# EAGLE board Casillero (EAGLE 9.6.2)
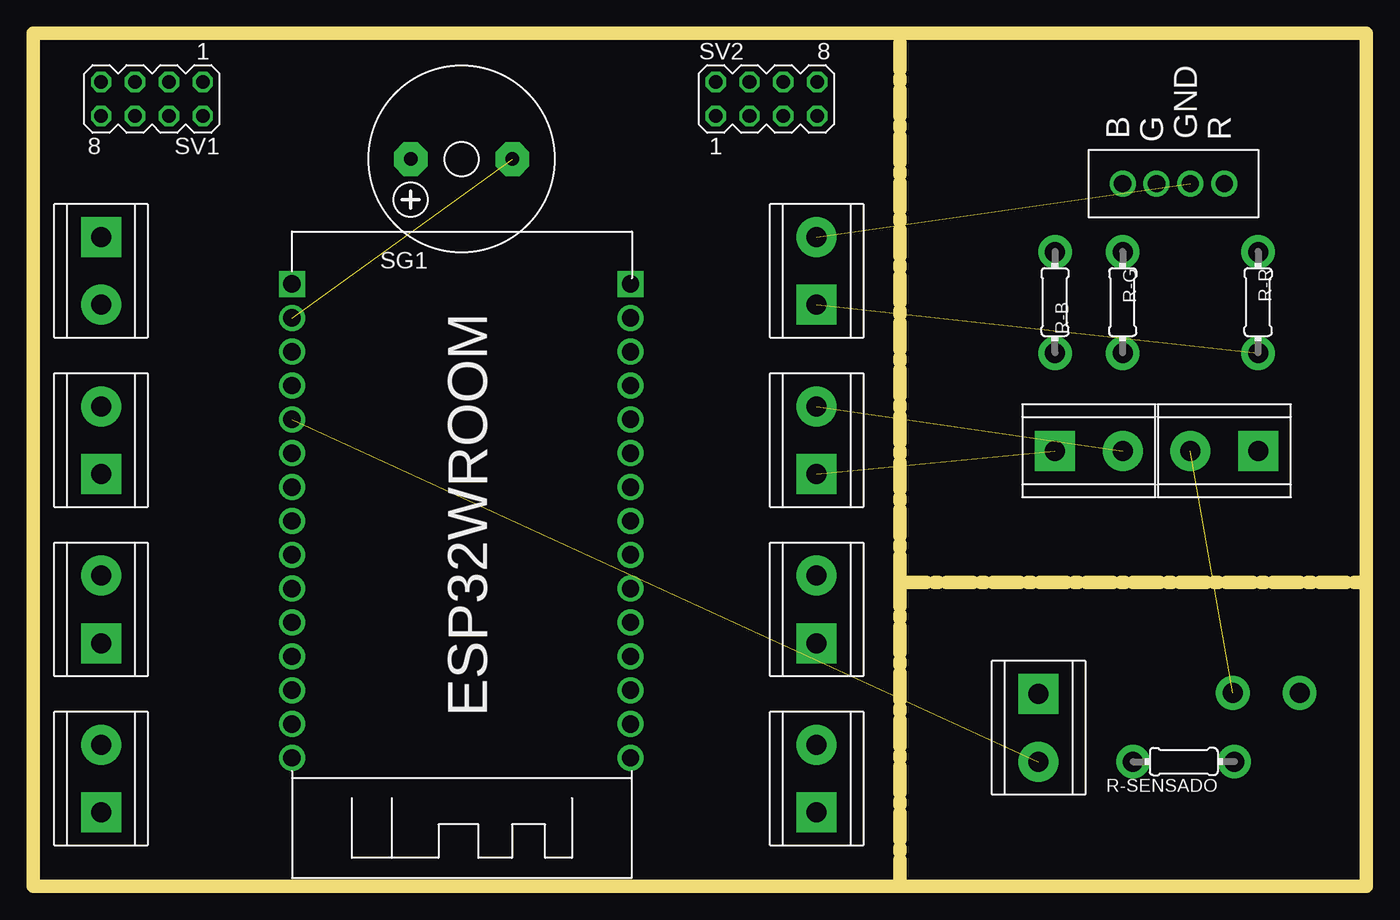
[diagram p0: board, top side]
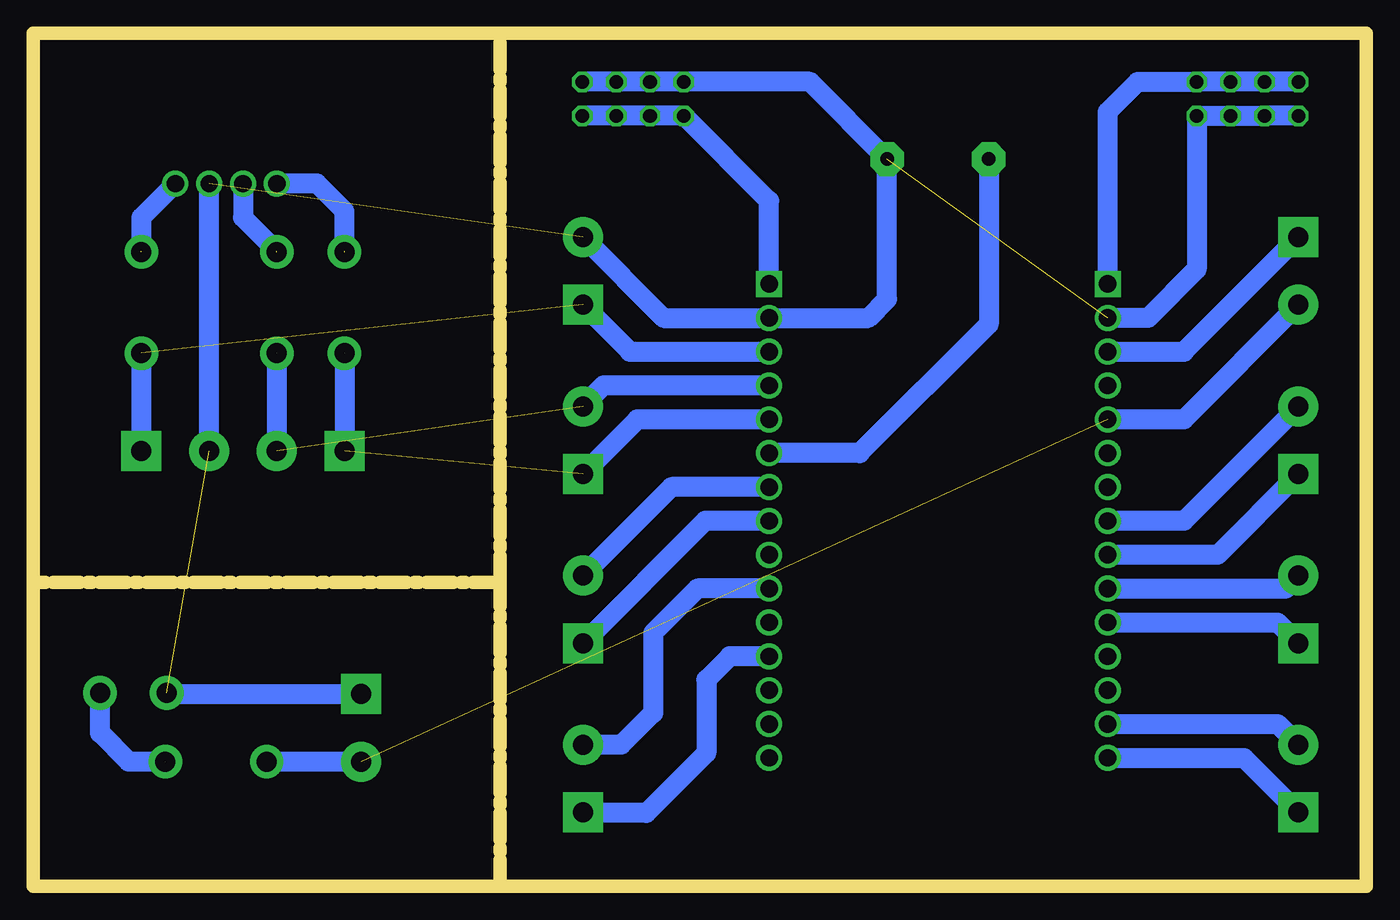
[diagram p1: board, bottom side, seen from below]

Size 100 x 64 mm. Coordinates in mm from the lower left corner, seen from the top.
Outline: 65,0 0,0 0,64 65,64
Outline: 65,0 100,0 100,22.78
Outline: 100,22.78 100,64 65,64
Outline: 65,0 65,22.78
Outline: 65,22.78 65,64
Outline: 65,22.78 100,22.78
Copper layers (1*16): Top 0.035mm / dielectric 1.5mm / Bottom 0.035mm
Design rules "default": minimum track width 6mil, minimum drill 0.35mm, track to track 6mil, track to pad 6mil, pad to pad 6mil, via to via 6mil, smd to smd 6mil, copper to edge 40mil, drill to drill 6mil, minimum pad ring 10mil, minimum via ring 8mil, stop-mask expansion 4mil, vias tented up to drill 0mil, thermal gap 10mil

## Footprints (pad centres in the part's own frame; a part is rotated, then mirrored left to right if it is on the bottom)
0204/7 = drill 0.813 octagon: 1 -3.81,0; 2 3.81,0
F/CM12P = drill 1.016 pad 2.54 octagon: + 3.81,0; - -3.81,0
MA04-2 = drill 1.016 octagon: 1 -3.81,-1.27; 2 -3.81,1.27; 3 -1.27,-1.27; 4 -1.27,1.27; 5 1.27,-1.27; 6 1.27,1.27; 7 3.81,-1.27; 8 3.81,1.27
ESP32WROOM = drill 1.3 square: 3V3 18.56,14; VIN 18.56,-11.4 | drill 1.3: D2 10.94,14; D4 8.4,14; D5 0.78,14; D12 10.94,-11.4; D13 13.48,-11.4; D14 8.4,-11.4; D15 13.48,14; D18 -1.76,14; D19 -4.3,14; D21 -6.84,14; D22 -14.46,14; D23 -17,14; D25 0.78,-11.4; D26 3.32,-11.4; D27 5.86,-11.4; D32 -4.3,-11.4; D33 -1.76,-11.4; D34 -9.38,-11.4; D35 -6.84,-11.4; EN -17,-11.4; GND@0 16.02,-11.4; GND@1 16.02,14; RX0 -9.38,14; RX2 5.86,14; TX0 -11.92,14; TX2 3.32,14; VN -11.92,-11.4; VP -14.46,-11.4
CLEMAS = drill 1.5 pad 3 square: 1 0,0 | drill 1.5 pad 3: 2 5.08,0
LEDRGB = drill 1.3: B 7.62,0; G 5.08,0; GND 2.54,0; R 0,0

## Placement (x,y rotation side)
R-B  220  [0204/7]  76.65,43.83 270 top
R-G  220  [0204/7]  81.73,43.83 270 top
R-R  220  [0204/7]  91.89,43.83 270 top
R-SENSADO  220  [0204/7]  86.31,9.35 180 top
SG1  F/CM12P  [F/CM12P]  32.13,54.57 180 top
SV1  [MA04-2]  8.9,59.08 180 top
SV2  [MA04-2]  55,59.08 0 top
U$1  ESP32WROOM  [ESP32WROOM]  33.4,26.63 90 top
U$2  CLEMAS  [CLEMAS]  5.08,5.53 90 top
U$3  LEDRGB  [LEDRGB]  89.35,52.72 180 top
U$4  CLEMAS  [CLEMAS]  5.08,18.23 90 top
U$5  CLEMAS  [CLEMAS]  5.08,30.93 90 top
U$6  CLEMAS  [CLEMAS]  5.08,48.71 270 top
U$7  CLEMAS  [CLEMAS]  58.77,5.53 90 top
U$8  CLEMAS  [CLEMAS]  58.77,18.23 90 top
U$9  CLEMAS  [CLEMAS]  58.77,30.93 90 top
U$10  CLEMAS  [CLEMAS]  58.77,43.63 90 top
U$11  CLEMAS  [CLEMAS]  76.65,32.67 0 top
U$12  CLEMAS  [CLEMAS]  91.89,32.67 180 top
U$13  CLEMAS  [CLEMAS]  75.42,14.43 270 top

## Library data of the parts
R-B R-G R-R R-SENSADO = rcl; SPICEPREFIX: R
SG1 = buzzer; OC_FARNELL: unknown; OC_NEWARK: unknown
SV1 SV2 = con-lstb; OC_FARNELL: unknown; OC_NEWARK: unknown
U$1-U$13 = MODULAR

## Nets
3V3: SV1.1 SV1.3 SV1.5 SV1.7 U$1.3V3
BUZZER: SG1.+ U$1.D27
CERRADURA_CTRL: U$1.D25 U$8.1
CERRADURA_VCC: U$1.D26 U$8.2
GA_DT: U$1.D19 U$4.2
GA_LED: U$1.D21 U$4.1
GA_SCK: U$1.D18 U$5.1
GND: SG1.- SV1.2 SV1.4 SV1.6 SV1.8 SV2.2 SV2.4 SV2.6 SV2.8 U$1.GND@0 U$1.GND@1 U$3.GND U$10.2 U$12.2 U$13.1
IR: U$1.D34 U$7.1
LCD_SCL: U$1.D5 U$5.2
LCD_SDA: U$1.D15 U$6.1
LED_B: R-B.2 U$1.D14 U$9.1 U$11.1
LED_G: R-G.2 U$1.D12 U$9.2 U$11.2
LED_R: R-R.2 U$1.D13 U$10.1 U$12.1
LIBRE3: U$1.D33
N$2: R-R.1 U$3.R
N$3: R-G.1 U$3.G
N$4: R-B.1 U$3.B
N$5: U$1.RX2
N$6: U$1.TX2
N$7: R-SENSADO.1
N$11: U$1.RX0
N$12: U$1.TX0
N$27: U$1.VN
N$28: U$1.VP
N$29: U$1.EN
PURA-ENTRADA2: U$1.D35
SENSADO_LED: R-SENSADO.2 U$1.D4 U$6.2 U$13.2
UL_ECHO: U$1.D22 U$2.2
UL_LED: U$1.D32 U$7.2
UL_TRG: U$1.D23 U$2.1
VIN: SV2.1 SV2.3 SV2.5 SV2.7 U$1.VIN
WIFI_LED: U$1.D2

## Tracks (layer width: path | path; a pad name or v marks a point on that pad's centre or on a via)
3V3
  Bottom 1.5: U$1.3V3 19.4,58.1 17.15,60.35 SV1.1 SV1.3 SV1.5 SV1.7
BUZZER
  Bottom 1.5: SG1.+ 28.32,42.18 38.01,32.49 U$1.D27
CERRADURA_CTRL
  Bottom 1.5: U$1.D25 49.59,27.41 U$8.1
CERRADURA_VCC
  Bottom 1.5: U$1.D26 52.13,29.95 U$8.2
GA_DT
  Bottom 1.5: U$1.D19 6.06,22.33 U$4.2
GA_LED
  Bottom 1.5: U$1.D21 6.64,19.79 U$4.1
GA_SCK
  Bottom 1.5: U$5.1 11.14,24.87 U$1.D18
GND  (via drill 1.5 pad 2.54)  (3 unrouted)
  Bottom 1.5: U$12.2 U$3.GND | v90,14.5 89.93,14.43 U$13.1 | U$10.2 52.71,42.65 U$1.GND@0 37.35,42.65 35.94,44.06 SG1.- 41.72,60.35 SV2.2 SV2.4 SV2.6 SV2.8 | U$1.GND@1 16.35,42.65 12.71,46.29 SV1.2 SV1.4 SV1.6 SV1.8
IR
  Bottom 1.5: U$1.D34 47.75,17.25 49.5,15.5 49.5,10 54,5.5 58.74,5.5 U$7.1
LCD_SCL
  Bottom 1.5: U$5.2 13.68,27.41 U$1.D5
LCD_SDA
  Bottom 1.5: U$1.D15 13.68,40.11 U$6.1
LED_B  (via drill 1.5 pad 2.5)  (2 unrouted)
  Bottom 1.5: R-B.2 U$11.1 | U$1.D14 54.67,35.03 U$9.1
  other vias: 76.65,40
LED_G  (via drill 1.5 pad 2.5)  (2 unrouted)
  Bottom 1.5: R-G.2 U$11.2 | U$1.D12 57.21,37.57 U$9.2
  other vias: 81.73,40
LED_R  (via drill 1.5 pad 2.5)  (2 unrouted)
  Bottom 1.5: R-R.2 U$12.1 | U$10.1 55.25,40.11 U$1.D13
  other vias: 91.89,40
N$2  (via drill 1.5 pad 2.5)  (1 unrouted)
  Bottom 1.5: U$3.R 91.89,50.18 R-R.1
  other vias: 91.89,47.6
N$3  (via drill 1.5 pad 2.5)  (1 unrouted)
  Bottom 1.5: U$3.G 84.27,50.18 R-G.1
  other vias: 81.73,47.6
N$4  (via drill 1.5 pad 2.5)  (1 unrouted)
  Bottom 1.5: R-B.1 76.65,50.65 78.72,52.72 U$3.B
  other vias: 76.65,47.6
N$7  (via drill 1.5 pad 2.5, 1.5 pad 2.54)  (1 unrouted)
  Bottom 1.5: R-SENSADO.1 92.85,9.35 95,11.5 v95,14.5
  other vias: 90.1,9.35
SENSADO_LED  (via drill 1.5 pad 2.5)  (1 unrouted)
  Bottom 1.5: U$13.2 R-SENSADO.2 | U$6.2 13.68,35.03 U$1.D4
  other vias: 82.5,9.35
UL_ECHO
  Bottom 1.5: U$1.D22 6.64,12.17 U$2.2
UL_LED
  Bottom 1.5: U$1.D32 50.17,22.33 53.5,19 53.5,13 55.89,10.61 U$7.2
UL_TRG
  Bottom 1.5: U$1.D23 9.18,9.63 U$2.1
VIN
  Bottom 1.5: U$1.VIN 44.8,51.42 SV2.1 SV2.3 SV2.5 SV2.7